# Altium PCB DC_DC1.PcbDoc
Units mm, origin at the board's own origin, x right, y up, seen from the top; angles counter-clockwise.
Board outline 93.09 x 48.26 mm, 2 copper layers (Top Layer, Bottom Layer); 19 components, 7 nets, 46 pads, 1 vias.
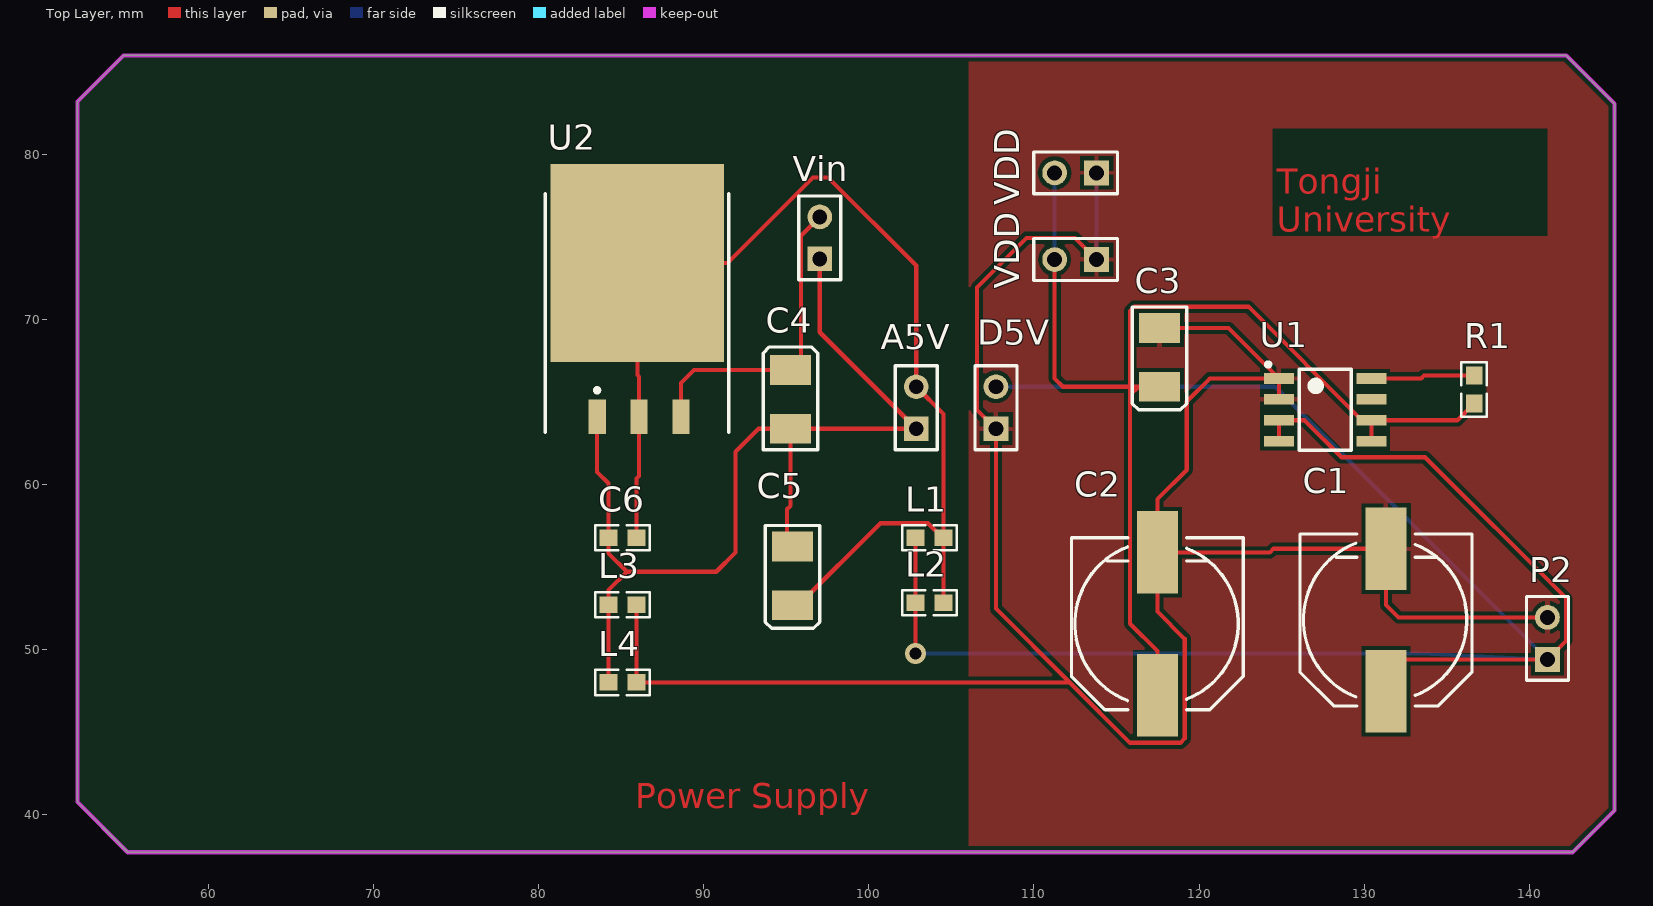
[diagram p0: Top Layer view]
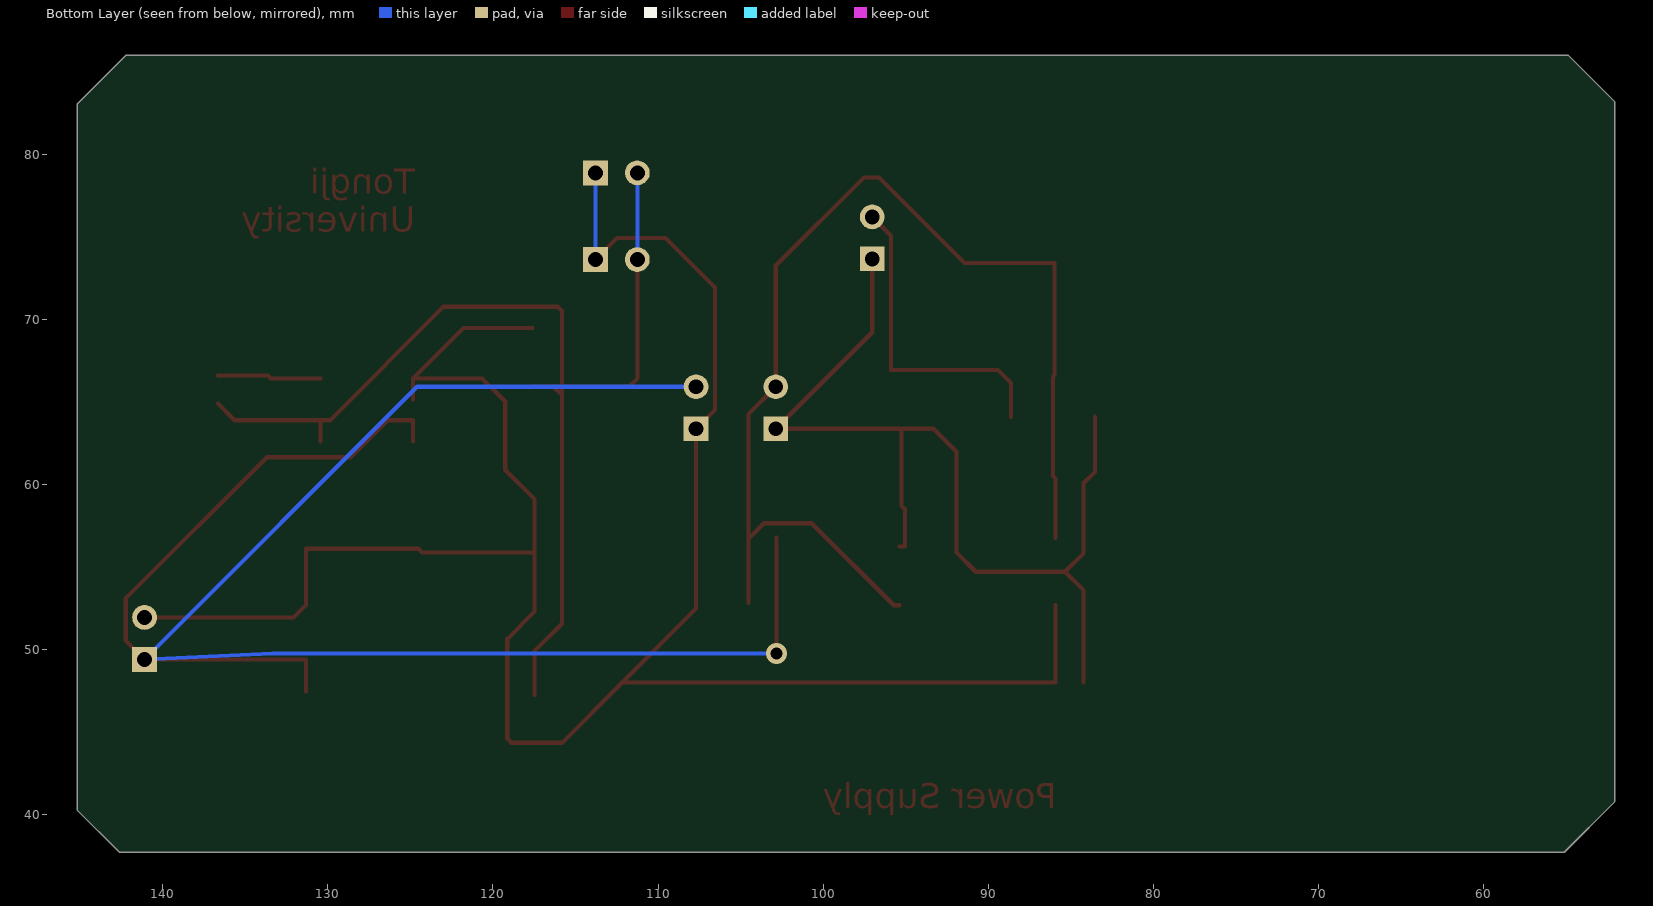
[diagram p1: Bottom Layer view, seen from below]

## Layer stack, top to bottom
Top Solder: solder mask 0.0102, Solder Resist, Dk 3.5
Top Layer: signal copper 0.0356
Dielectric 1: dielectric 0.32, FR-4, Dk 4.8
Bottom Layer: signal copper 0.0356
Bottom Solder: solder mask 0.0102, Solder Resist, Dk 3.5

## Board outline
52.07,40.767 55.118,37.719 142.621,37.719 145.161,40.259 145.161,83.058 142.24,85.979 54.864,85.979 52.07,83.185

## Design rules (kind name [scope] priority, off if disabled: settings)
Clearance [All] p1: gap=0.254 ignorepadtopadclearanceinfootprint=FALSE except(0: Arc-Hole Track-Hole SMDPad-Hole THPad-Hole Via-Hole Fill-Hole Poly-Hole Region-Hole Text-Hole)
PolygonConnect [All] p1: connectstyle=Relief reliefconductorwidth=0.254 reliefentries=4 polygonreliefangle="90 Angle" airgapwidth=0.254
RoutingVias [All] p1: holewidth=0.711 width=1.27 viastyle="Through Hole" minholewidth=0.711 minwidth=1.27 maxholewidth=0.711 maxwidth=1.27
SolderMaskExpansion [All] p1: expansion=0.102
Width [All] p1: maxlimit=0.254 minlimit=0.254 preferedwidth=0.254
30 further rules are at their usual default settings.

## Classes and differential pairs
component class DC_DC: A5V C1 C2 C3 C4 C5 C6 D5V L1 L2 L3 L4 P2 R1 U1 U2 Vin

## Components (designator, comment, footprint, x,y, rotation, side; value= is the part's Value field where it differs from the comment)
A5V "Analog" HDR1X2 102.87,63.373 r90 top (schematic designator P6)
C1 "10uF/16V" C-RB-SD10 131.318,51.791 r90 top value=10uF
C2 "0.1uF/16V" C-RB-SD10 117.475,51.562 r90 top value=0.1uF
C3 "CT-22uF/16V" CAP-3528 117.602,67.691 r90 top
C4 "CT-22uF/16V" CAP-3528 95.25,65.151 r270 top
C5 "CT-22uF/16V" CAP-3528 95.377,54.458 r90 top
C6 "C-0.1uF/16V" 0603-1 85.08,56.769 r0 top value=100nF
D5V "Digital" HDR1X2 107.696,63.373 r90 top (schematic designator P5)
L1 "L-MB" 0603-1 103.671,56.769 r0 top
L2 "L-MB" 0603-1 103.671,52.832 r0 top
L3 "L-MB" 0603-1 85.08,52.705 r180 top
L4 "L-MB" 0603-1 85.08,48.006 r180 top
P2 "Header 2" HDR1X2 141.097,49.403 r90 top
R1 "249k" 0603-1 136.652,65.747 r270 top value=1K
U1 "U-TPS76833QD" SOIC8 127.635,64.516 r0 top
U2 "U-LM1085" TO263-3 86.083,68.326 r0 top
VDD "Header 2" HDR1X2 113.792,78.867 r180 top (schematic designator P4)
VDD "Header 2" HDR1X2 113.792,73.618 r180 top (schematic designator P3)
Vin "V in" HDR1X2 97.028,73.66 r90 top (schematic designator P7)

## Footprints (in the part's own frame and the unit in brackets; to place one, negate y for a bottom-side part, rotate by r counter-clockwise, add the part's x,y. Pads: shape width x height; smd on the part's side, far side on the other; paste and mask are expansions set on the pad)
0603-1 [mm] "0603带丝印"
  rect 1.1x1 smd: 1(-0.85,0) 2(0.85,0)
  silkscreen extent -1.65,-0.76 1.65,0.76, body extent -0.8,-0.4 0.8,0.4, height 0.3
C-RB-SD10 [mm] "贴片铝电解"
  rect 5x2.5 smd: 1(-4.318,0) 2(4.318,0)
  silkscreen extent -5.21,-5.21 5.21,5.21, body extent -5.21,-5.21 5.21,5.21, height 10.5
CAP-3528 [mm] "钽电容"
  rect 1.8x2.5 smd: 1(-1.778,0) 2(1.778,0)
  silkscreen extent -3.17,-1.65 3.05,1.65, body extent -1.91,-1.4 1.91,1.4, height 1.1
HDR1X2 [mm] "Connector; Header; 2 Position"
  rect 1.5x1.5 hole 0.9: 1(0,0)
  round 1.5 hole 0.9: 2(2.54,0)
  silkscreen extent -1.27,-1.27 3.81,1.27
SOIC8 [mm] "SOIC,1.27mm pitch;8 pin,3.90mm W X 4.88mm L X 1.73mm H body"
  rect 1.8x0.65 smd: 1(-2.8,1.905) 2(-2.8,0.635) 3(-2.8,-0.635) 4(-2.8,-1.905) 5(2.8,-1.905) 6(2.8,-0.635) 7(2.8,0.635) 8(2.8,1.905)
  silkscreen extent -3.57,-2.45 1.58,2.87, body extent -3.11,-2.45 3.11,2.45, height 1.75
TO263-3 [mm] "LM2940/LM1086"
  rect 1.05x2.1 smd: 1(-2.54,-4.225) 2(0,-4.225) 3(2.54,-4.225)
  rect 10.5x12 smd: 2(-0.104,5.08)
  silkscreen extent -5.68,-5.17 5.42,9.28, body extent -5.46,-4.7 5.21,9.27, height 1.6

## Part data
A5V D5V Vin: library part "Header 2", "Header, 2-Pin", LatestRevisionDate=17-Jul-2002, LatestRevisionNote="Re-released for DXP Platform.", Publisher="Altium Limited"
C1 C2: library part "Cap Pol2", "Polarized Capacitor (Axial)", LatestRevisionDate=17-Jul-2002, LatestRevisionNote="Re-released for DXP Platform.", PackageDescription="Polarized Capacitor; 2 Leads", PackageReference=POLAR0.8, Published=8-Jun-2000, Publisher="Altium Limited"
C3: "钽电容", Comment_1=Cap-Pol, LatestRevisionDate=17-Jul-2002, LatestRevisionNote="Re-released for DXP Platform.", PackageReference=RB7.6-15, Published=8-Jun-2000, Publisher="Altium Limited"
C4 C5: library part Cap-Pol-A, "钽电容", Comment_1=Cap-Pol, LatestRevisionDate=17-Jul-2002, LatestRevisionNote="Re-released for DXP Platform.", PackageReference=RB7.6-15, Published=8-Jun-2000, Publisher="Altium Limited"
C6: library part Cap, "Capacitor", LatestRevisionDate=17-Jul-2002, LatestRevisionNote="Re-released for DXP Platform.", PackageDescription="Radial Cap, Thru-Hole; 2 Leads; 0.3 in Pin Spacing", PackageReference=RAD-0.3, Published=8-Jun-2000, Publisher="Altium Limited"
L1 L2 L3 L4: library part Res2, "Resistor", LatestRevisionDate=17-Jul-2002, LatestRevisionNote="Re-released for DXP Platform.", PackageReference=AXIAL-0.4, Published=8-Jun-2000, Publisher="Altium Limited"
P2 VDD VDD: "Header, 2-Pin", LatestRevisionDate=17-Jul-2002, LatestRevisionNote="Re-released for DXP Platform.", Publisher="Altium Limited"
R1: library part Res3, "Resistor", LatestRevisionDate=29-May-2009, LatestRevisionNote="IPC-7351 Footprint Added.", PackageDescription="Chip Resistor", PackageReference=J1-0603, Published=8-Jun-2000, Publisher="Altium Limited"
U1: library part TPS76850
U2: library part LM1085

## Via types
v1: diameter 1.27, hole 0.711, Top Layer to Bottom Layer, 1 vias

## Nets (pads, with @x,y where several pads share a name; then routed paths per layer and width w, separated by ;. In a path a pad name is that pad's centre, name@x,y a point inside that pad or via, vN(x,y) a via of type N, cw(c..) or ccw(c..) an arc to the next point about the centre after c; other vN are vias at no path point)
DC+3.3V: C2.1 C3.1 R1.2 U1.5 U1.6 VDD.2 | length 69.2
  Top Layer w0.254: VDD.2@111.252,73.618 111.252,66.421 111.76,65.913 115.824,65.913 ; C2.1 117.475,49.911 115.824,51.562 115.824,65.405 ; C3.1 116.332,65.913 ; U1.5 U1.6 ; R1.2 135.636,63.881 U1.6 ; 115.824,65.405 115.824,65.913 ; 115.824,65.405 116.332,65.913 ; 115.824,65.913 116.332,65.913 ; 115.824,65.913 115.824,70.51 116.078,70.764 122.987,70.764 129.87,63.881 U1.6
  Bottom Layer w0.254: VDD.2@111.252,73.618 VDD.2@111.252,78.867
DC+5V: C1.1 D5V.2 L1.1 L2.1 P2.1 U1.3 U1.4 | length 124.5
  Top Layer w0.254: v1(102.821,49.759) L2.1 L1.1 ; U1.4 U1.3 126.39,63.881 128.626,61.646 133.68,61.646 142.24,53.086 142.24,50.546 P2.1 131.318,49.403 C1.1
  Bottom Layer w0.254: v1(102.821,49.759) 133.362,49.759 P2.1 124.587,65.913 D5V.2
DC+5V_ANALOG: A5V.2 C5.1 C6.2 L1.2 L2.2 U2.2 | length 70.7
  Top Layer w0.254: C6.2 85.93,60.35 86.083,60.504 86.083,64.101 86.083,66.523 85.979,66.627 85.979,73.406 91.44,73.406 96.622,78.588 97.536,78.588 102.87,73.254 A5V.2 104.521,64.262 L1.2 ; C5.1 95.727,52.68 100.697,57.65 103.59,57.65 104.471,56.769 L1.2 ; L2.2 L1.2
GND: C1.2 C2.2 C3.2 D5V.1 L3.1 L4.1 P2.2 U1.1 U1.2 VDD.1 | length 145.2
  Top Layer w0.254: L3.1 85.93,50.343 L4.1 112.166,48.006 ; VDD.1@113.792,73.618 112.48,74.93 109.55,74.93 106.553,71.933 106.553,64.516 D5V.1 107.696,52.476 112.166,48.006 ; C3.2 121.787,69.469 U1.1 ; U1.2 U1.1 ; P2.2 132.08,51.943 131.318,52.705 C1.2 124.511,56.109 124.282,55.88 C2.2 ; 112.166,48.006 115.824,44.348 118.872,44.348 119.126,44.602 119.126,50.648 117.475,52.299 C2.2 ; C2.2 117.475,59.106 119.253,60.884 119.253,65.024 120.65,66.421 U1.1
  Bottom Layer w0.254: VDD.1@113.792,73.618 VDD.1@113.792,78.867
IGND: A5V.1 C4.2 C5.2 C6.1 L3.2 L4.2 U2.1 Vin.1 | length 62.2
  Top Layer w0.254: U2.1 83.543,60.758 84.23,60.071 C6.1 84.23,55.826 85.344,54.712 ; L4.2 84.23,50.343 L3.2 84.23,53.598 85.344,54.712 ; C5.2 95.044,56.236 95.044,58.496 95.25,58.702 C4.2 ; Vin.1 97.028,69.215 A5V.1 C4.2 ; 85.344,54.712 90.754,54.712 91.923,55.88 91.923,61.976 93.32,63.373 C4.2
NetR1_1: R1.1 U1.8 | length 6.3
  Top Layer w0.254: U1.8 133.452,66.421 133.628,66.597 R1.1
VCC_RAW: C4.1 U2.3 Vin.2 | length 19.4
  Top Layer w0.254: U2.3 88.623,66.144 89.408,66.929 C4.1 95.885,66.929 95.885,75.057 Vin.2
pads on no net: U1.7

## Polygon pours and split planes (outlines as drawn)
GND on Bottom Layer (solid, pour order 10): 104.521,85.852
GND on Top Layer "GND_L01_P020" (solid, remove dead copper, pour order 20): 105.791,85.979 106.045,85.725 106.045,37.719 142.367,37.719 144.907,40.259 145.161,40.259 145.161,83.058 142.24,85.979

## Keep-outs
Top Layer:
  lines w0.254: 52.07,40.767 55.118,37.719 59.055,37.719 142.621,37.719 145.161,40.259 145.161,83.058 142.24,85.979 54.864,85.979 52.07,83.185 52.07,40.767

## Other copper
Top Layer:
  text "Tongji  / University" at 124.714,75.311 h1.52
  text "Power Supply" at 85.852,40.386 h1.52